# EAGLE board PCB v4 (EAGLE 9.7.0)
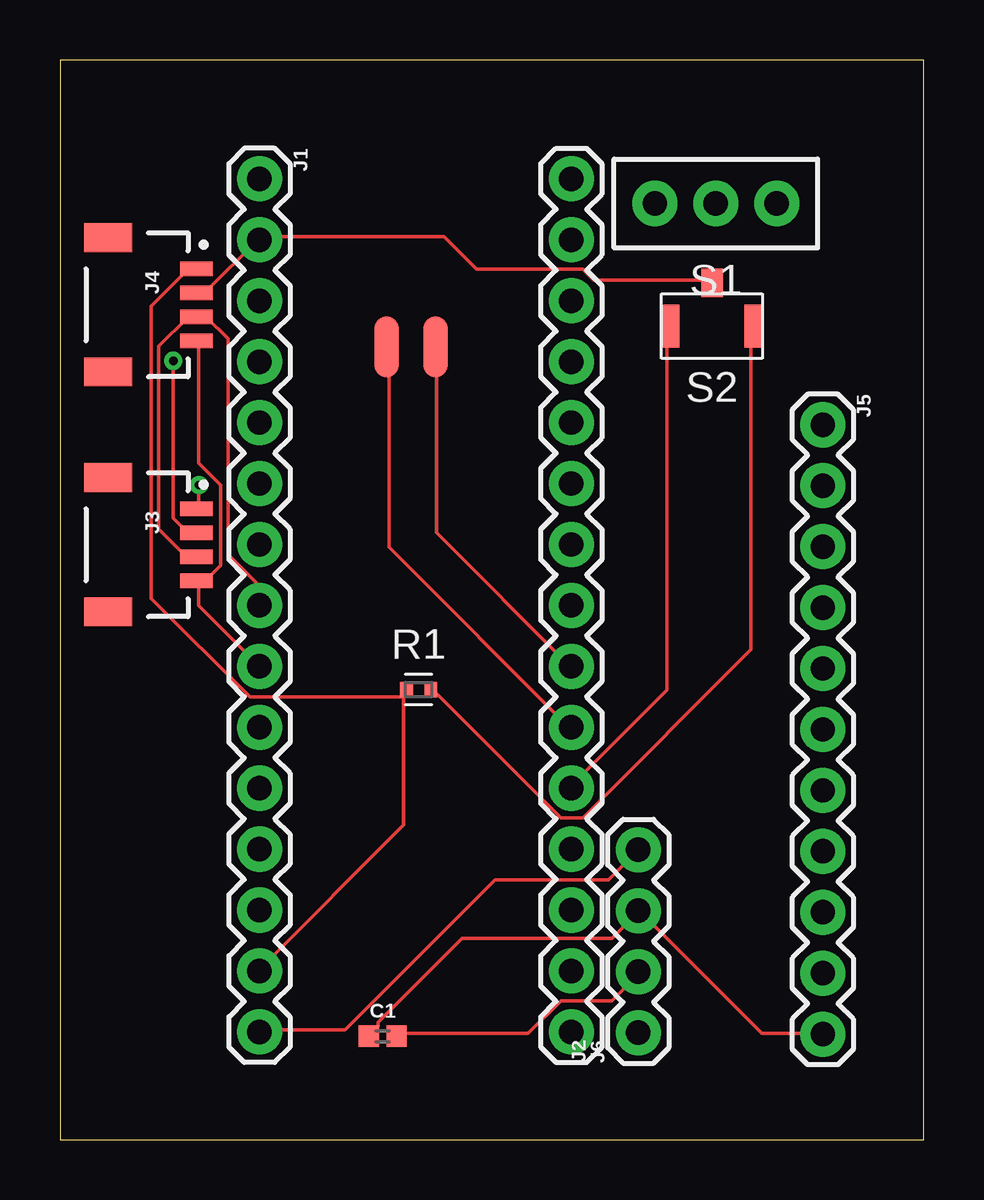
[diagram p0: board, top side]
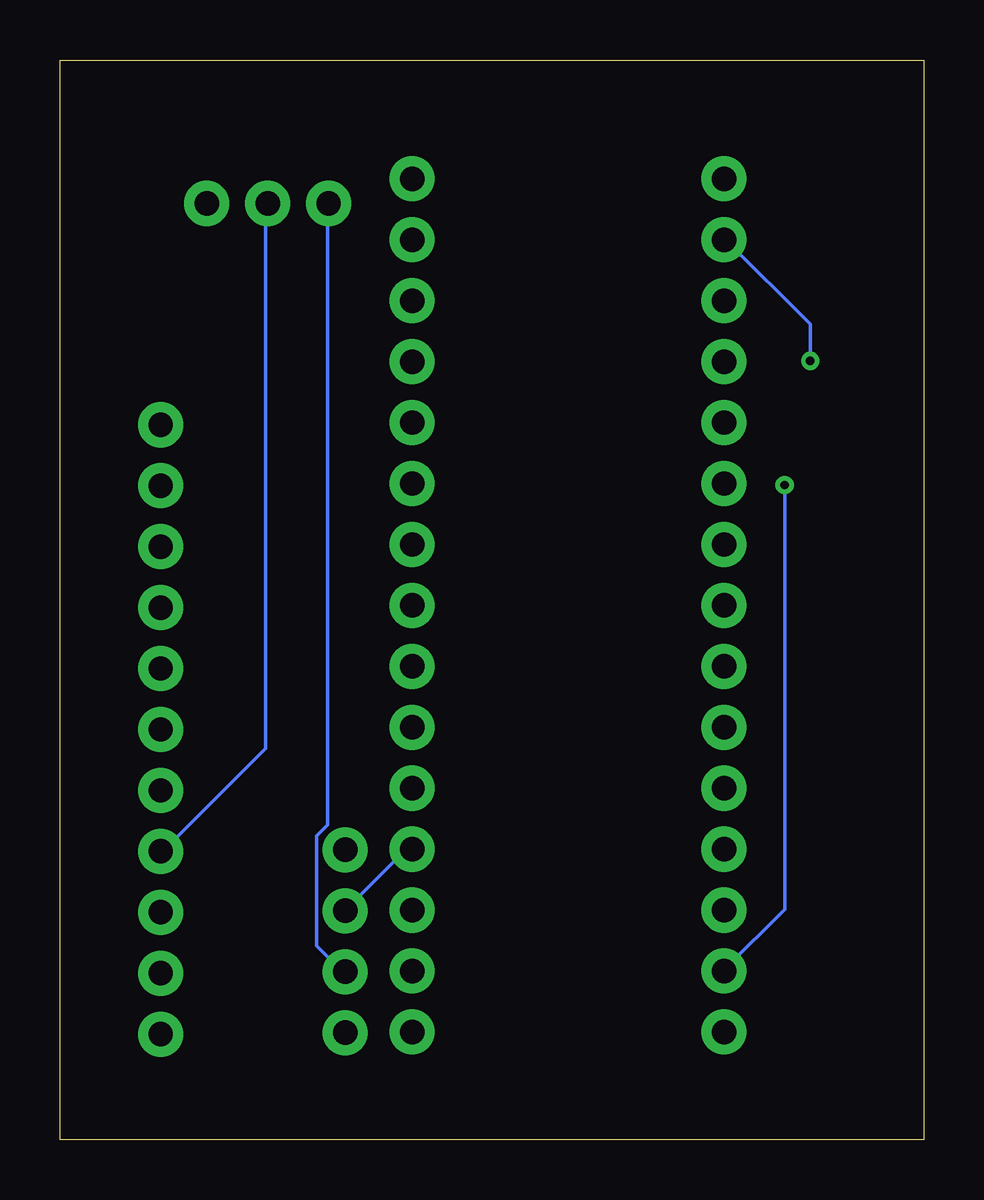
[diagram p1: board, bottom side, seen from below]

Size 36 x 45 mm. Coordinates in mm from the lower left corner, seen from the top.
Outline: 0,0 36,0 36,45 0,45 0,0
Copper layers (1*16): Top / Bottom
Stack-up Default Layer Stack: Top SilkScreen Epoxy Ink / Top SolderMask SR:Green 0.0254mm Dk 4.3 / Top Surface Finish Lead-Free 0.02mm / Top CuFoil:007 0.035mm / Dielectric-1 User Defined 1.5mm / Bottom CuFoil:007 0.035mm / Bottom Surface Finish Lead-Free 0.02mm / Bottom SolderMask SR:Green 0.0254mm Dk 4.3 / Bottom SilkScreen Epoxy Ink
Design rules: minimum copper width 6mil, minimum drill size 0.35mm, copper clearance wire_polygon to wire_polygon 6mil, copper clearance wire_polygon to pad_smd 6mil, copper clearance wire_polygon to via 6mil, copper clearance pad_smd to pad_smd 6mil, copper clearance pad_smd to via 6mil, copper clearance via to via 6mil, copper clearance smd to pad (same net) 6mil, copper clearance smd to via (same net) 6mil, copper clearance smd to smd (same net) 6mil, dimension clearance 40mil, via restrict clearance 0mil, restrict clearance 0mil, drill distance 6mil, keepout clearance 0mil

## Footprints (pad centres in the part's own frame; a part is rotated, then mirrored left to right if it is on the bottom)
0402 = smd 0.85 x 0.9: 1 -0.58,0; 2 0.58,0
1X15 = drill 1.016 pad 1.88: 1 0,0; 2 2.54,0; 3 5.08,0; 4 7.62,0; 5 10.16,0; 6 12.7,0; 7 15.24,0; 8 17.78,0; 9 20.32,0; 10 22.86,0; 11 25.4,0; 12 27.94,0; 13 30.48,0; 14 33.02,0; 15 35.56,0
JST04_1MM_RA = smd 0.6 x 1.35: 1 -1.5,0; 2 -0.5,0; 3 0.5,0; 4 1.5,0 | smd 1.2 x 2: NC1 2.8,-3.675; NC2 -2.8,-3.675
1X11 = drill 1.016 pad 1.88: 1 0,0; 2 2.54,0; 3 5.08,0; 4 7.62,0; 5 10.16,0; 6 12.7,0; 7 15.24,0; 8 17.78,0; 9 20.32,0; 10 22.86,0; 11 25.4,0
1X04 = drill 1.016 pad 1.88: 1 0,0; 2 2.54,0; 3 5.08,0; 4 7.62,0
SOLDER_PAD_2 = smd 1.016 x 2.54: P$1 -1.016,0; P$2 1.016,0
RESC1005X40 = smd 0.535 x 0.644: 1 -0.507,0; 2 0.507,0
SWITCH-SPDT-PTH-8.5X3.7MM = drill 1.016 pad 1.88: 1 -2.54,0; 2 0,0; 3 2.54,0
B3U-1100P(M) = smd 0.8 x 1.8: 1 1.75,0; 2 -1.75,0 | smd 0.9 x 1.2: 3 0,-1.8

## Placement (x,y rotation side)
C1  33µF  [0402]  13.45,4.31 0 top
J1  [1X15]  8.32,40.04 270 top
J2  [1X15]  21.32,4.48 90 top
J3  QWIIC_RIGHT_ANGLE  [JST04_1MM_RA]  5.69,24.8 270 top
J4  QWIIC_RIGHT_ANGLE  [JST04_1MM_RA]  5.69,34.8 270 top
J5  [1X11]  31.8,29.79 270 top
J6  [1X04]  24.11,4.46 90 top
J7  SOLDER_PAD_2  [SOLDER_PAD_2]  14.64,33.04 180 top
R1  10kΩ  [RESC1005X40]  14.95,18.75 0 top
S1  TOGGLE  [SWITCH-SPDT-PTH-8.5X3.7MM]  27.34,39.02 180 top
S2  B3U-X100B3U-1100P(M)1100P(M)  [B3U-1100P(M)]  27.18,33.91 180 top

## Library data of the parts
C1 = SparkFun-Capacitors
J1 J2 J5 J7 = SparkFun-Connectors
J3 J4 = SparkFun-Connectors; PROD_ID: CONN-13694
J6 = SparkFun-Connectors; PROD_ID: CONN-09696
R1 = Tinkercad; CATEGORY: Resistor; SUB-CATEGORY: Fixed
S1 = Tinkercad
S2 = Switch; CATEGORY: Switches; DATASHEET: https://omronfs.omron.com/en_US/ecb/products/pdf/en-b3u.pdf; DESCRIPTION: Tactile Switch SPST-NO Top Actuated Surface Mount; MANUFACTURER: Omron Electronics Inc-EMC Div; MPN: B3U-1100PM; OPERATING_TEMPERATURE: -25°C ~ 70°C; PACKAGE_SIZE: NA; PACKAGE_TYPE: SMD; PART_STATUS: ACTIVE; ROHS: COMPLIANT; SERIES: B3U; SUBCATEGORY: Tactile Switches; TYPE: SPST-NO

## Nets
N$1: J1.8 J3.3 J4.3
N$2: J1.9 J3.4 J4.4
N$3: J1.14 J3.1 J4.1 R1.1
N$4: J1.15 J6.4
N$5: C1.1 J2.4 J5.11 J6.3
N$6: J5.8 S1.2
N$7: C1.2 J6.2 S1.3
N$8: J2.7 J7.P$1
N$9: J2.6 J7.P$2
N$10: R1.2 S2.2
N$11: J2.5 S2.1
N$12: J1.2 J3.2 J4.2 S2.3

## Tracks (layer width: path | path; a pad name or v marks a point on that pad's centre or on a via)
N$1
  Top 0.152: J3.3 5.64,24.38 5.18,24.38 4.12,25.45 4.12,33.07 5.33,34.29 5.64,34.29 J4.3 5.79,34.29 6.1,34.29 7.01,33.38 7.01,24.38 8.23,23.16 8.23,22.4 J1.8
N$2
  Top 0.152: 5.79,23.01 5.79,22.25 8.23,19.81 J1.9 | 5.79,23.01 5.79,23.16 J3.4 5.79,23.01 | 5.79,23.01 6.71,23.93 6.71,27.28 5.79,28.19 5.79,33.22 J4.4
N$3  (via drill 0.35)
  Top 0.152: 14.33,18.44 14.33,13.11 8.38,7.16 J1.14 | 14.33,18.44 14.33,18.75 R1.1 14.33,18.44 | v5.79,27.28 5.79,26.36 J3.1 | 14.33,18.44 7.92,18.44 3.81,22.55 3.81,34.75 5.33,36.27 5.64,36.27 J4.1
  Bottom 0.152: v5.79,27.28 5.79,9.6 8.23,7.16 J1.14
N$4
  Top 0.152: J1.15 8.38,4.57 11.89,4.57 18.14,10.82 22.86,10.82 24.08,12.04 J6.4
N$5
  Top 0.152: C1.1 12.95,4.42 13.26,4.72 13.26,4.88 16.76,8.38 23.01,8.38 24.08,9.45 J6.3 24.23,9.45 29.26,4.42 31.7,4.42 J5.11
  Bottom 0.152: J2.4 21.34,12.04 21.64,12.04 24.08,9.6 J6.3
N$6
  Bottom 0.152: S1.2 27.43,39.01 27.43,16.31 31.7,12.04 J5.8
N$7
  Top 0.152: C1.2 14.17,4.42 19.51,4.42 20.88,5.79 23.01,5.79 24.08,6.86 J6.2
  Bottom 0.152: S1.3 24.84,39.01 24.84,13.11 25.3,12.65 25.3,8.08 24.23,7.01 J6.2
N$8
  Top 0.152: J7.P$1 15.7,32.97 15.7,25.3 21.18,19.81 J2.7
N$9
  Top 0.152: J7.P$2 13.72,32.97 13.72,24.69 21.18,17.22 J2.6
N$10
  Top 0.152: R1.2 15.54,18.75 20.88,13.41 21.79,13.41 28.8,20.42 28.8,33.83 S2.2
N$11
  Top 0.152: S2.1 25.3,33.83 25.3,18.75 21.34,14.78 J2.5
N$12  (via drill 0.35)
  Top 0.152: S2.3 27.13,35.81 22.25,35.81 21.79,36.27 17.37,36.27 16,37.64 8.38,37.64 J1.2 8.23,37.49 6.1,35.36 5.79,35.36 J4.2 | v4.72,32.46 4.72,25.91 5.18,25.45 5.64,25.45 J3.2
  Bottom 0.152: v4.72,32.46 4.72,33.98 8.23,37.49 J1.2